# Altium PCB usbtinyisp.PcbDoc
Units mm, origin at the board's own origin, x right, y up, seen from the top; angles counter-clockwise.
Board outline 55 x 20 mm, 2 copper layers (Top Layer, Bottom Layer); 27 components, 29 nets, 99 pads, 28 vias.
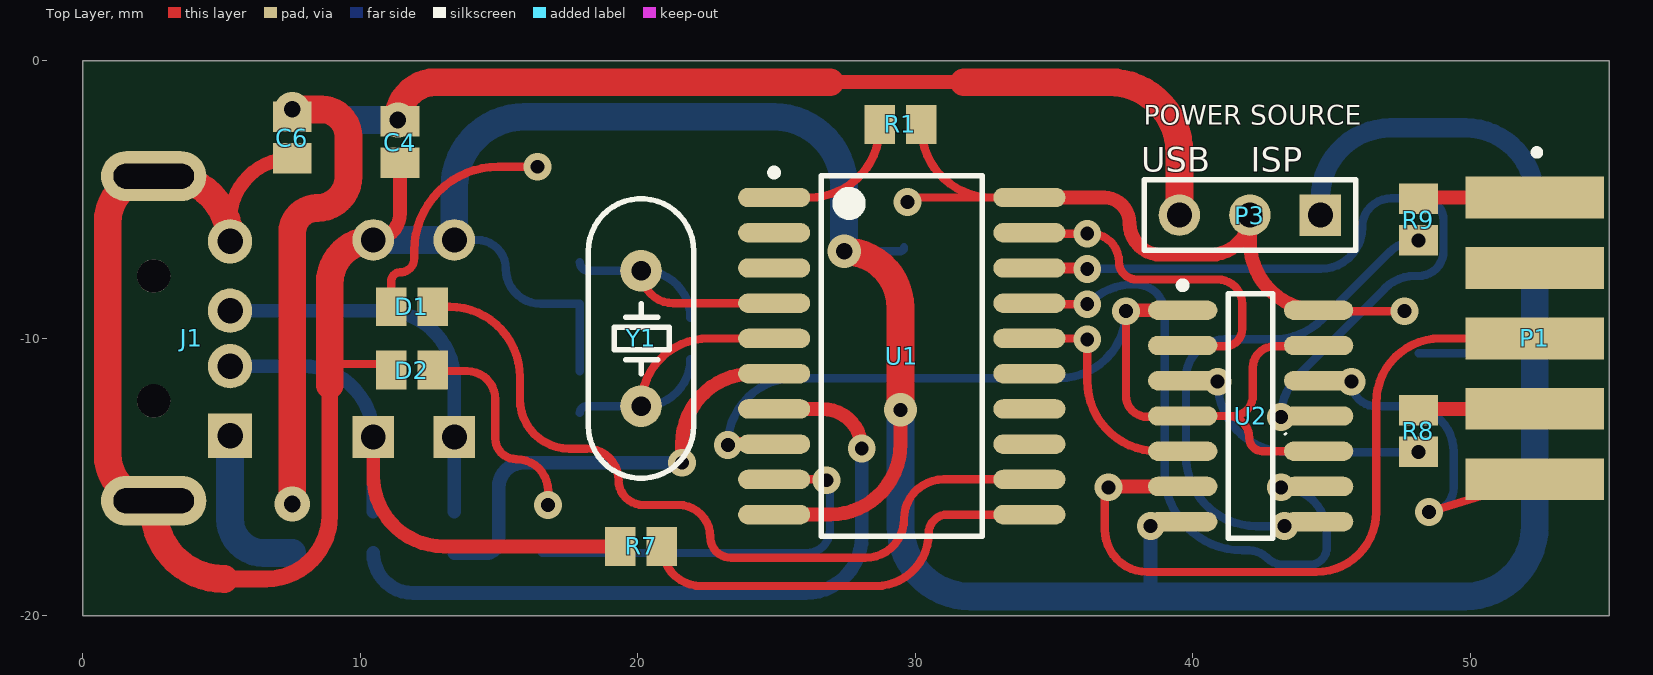
[diagram p0: Top Layer view]
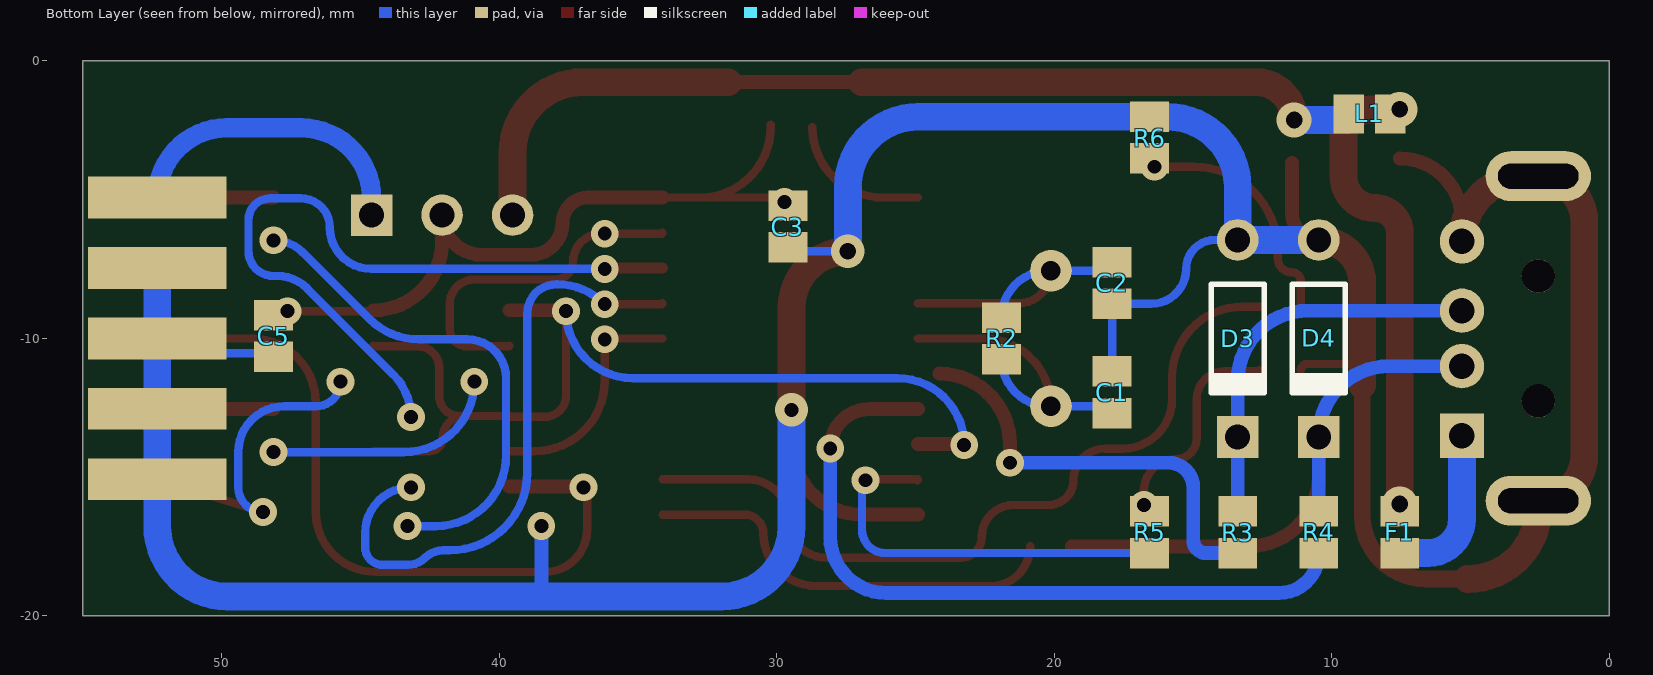
[diagram p1: Bottom Layer view, seen from below]

## Layer stack, top to bottom
Top Solder: solder mask 0.0102, Solder Resist, Dk 3.5
Top Layer: signal copper 0.0356
Dielectric 1: dielectric 0.32, FR-4, Dk 4.8
Bottom Layer: signal copper 0.0356
Bottom Solder: solder mask 0.0102, Solder Resist, Dk 3.5

## Board outline
0,-20 0,0 55,0 55,-20

## Design rules (kind name [scope] priority, off if disabled: settings)
Clearance [All] p1: gap=0.254
PolygonConnect [All] p1: connectstyle=Direct reliefconductorwidth=0.254 reliefentries=4 polygonreliefangle="90 Angle" airgapwidth=0.254
RoutingVias [All] p1: holewidth=0.5 width=1 viastyle="Through Hole" minholewidth=0.5 minwidth=1 maxholewidth=0.8 maxwidth=1.2
SolderMaskExpansion [All] p1: expansion=0.102
Width [All] p1: maxlimit=1 minlimit=0.1 preferedwidth=0.3 minimp=50.000000 maximp=50.000000 favimp=50.000000
30 further rules are at their usual default settings.

## Components (designator, comment, footprint, x,y, rotation, side; value= is the part's Value field where it differs from the comment)
C1 "Cap" C0805 17.907,-11.938 r270 bottom
C2 "Cap" C0805 17.907,-8.001 r90 bottom
C3 "Cap" C0805 29.591,-5.969 r90 bottom
C4 "Cap" C0805 11.43,-2.921 r270 top
C5 "Cap" C0805 48.133,-9.906 r90 bottom
C6 "Cap" C0805 7.54,-2.761 r90 top
D1 "LED" C0805 11.858,-8.857 r180 top
D2 "LED" C0805 11.858,-11.143 r180 top
D3 "Zener 3.6V" DO-35 13.382,-10 r270 bottom
D4 "Zener 3.6V" DO-35 10.461,-10 r270 bottom
F1 "Fuse 1" C0805 7.54,-16.985 r270 bottom
J1 "USB 2.0 A Plug TH" USB2_A_TH_PLUG 0,-10 r180 top
L1 "Ferrite" C0805 8.636,-1.905 r180 bottom
P1 "ISP" BOX2X5_PCB_EDGE 52.324,-10 r0 top
P3 "Select Power" HDR1X3 44.597,-5.555 r180 top
R1 "Res1" C0805 29.464,-2.286 r0 top
R2 "Res1" C0805 21.891,-10 r270 bottom
R3 "Res1" C0805 13.382,-16.985 r270 bottom
R4 "Res1" C0805 10.461,-16.985 r270 bottom
R5 "Res1" C0805 16.557,-16.985 r90 bottom
R6 "Res1" C0805 16.557,-2.761 r90 bottom
R7 "Res1" C0805 20.113,-17.493 r0 top
R8 "Res1" C0805 48.133,-13.335 r90 top
R9 "Res1" C0805 48.133,-5.715 r90 top
U1 "ATtiny2313A-SU" 20S_M 29.511,-10.635 r0 top
U2 "SN74AHC125D" D014_M 42.084,-12.794 r0 top
Y1 "XTAL" XTAL 20.113,-10 r90 top

## Footprints (in the part's own frame and the unit in brackets; to place one, negate y for a bottom-side part, rotate by r counter-clockwise, add the part's x,y. Pads: shape width x height; smd on the part's side, far side on the other; paste and mask are expansions set on the pad)
20S_M [mm] "SOIC, 20-Leads, Body 12.8x7.5mm, Pitch 1.27mm, IPC Low Density"
  oval 2.6x0.7 smd: 1(-4.6,5.715) 2(-4.6,4.445) 3(-4.6,3.175) 4(-4.6,1.905) 5(-4.6,0.635) 6(-4.6,-0.635) 7(-4.6,-1.905) 8(-4.6,-3.175) 9(-4.6,-4.445) 10(-4.6,-5.715) 11(4.6,-5.715) 12(4.6,-4.445) 13(4.6,-3.175) 14(4.6,-1.905) 15(4.6,-0.635) 16(4.6,0.635) 17(4.6,1.905) 18(4.6,3.175) 19(4.6,4.445) 20(4.6,5.715)
  silkscreen extent -4.72,-6.5 2.9,6.74, body extent -3.75,-6.5 3.75,6.5, height 2.65
BOX2X5_PCB_EDGE [mm] "Box Header on PCB Edge; 5x2 Position"
  rect 5x1.5 smd: 1(0,5.08) 3(0,2.54) 5(0,0) 7(0,-2.54) 9(0,-5.08)
  rect 5x1.5 smd far side: 2(0,5.08) 4(0,2.54) 6(0,0) 8(0,-2.54) 10(0,-5.08)
  silkscreen extent -0.02,6.61 0.18,6.81
C0805 [mm] "Chip Capacitor, Body 2.0x1.3mm, IPC High Density"
  rect 1.1x1.4 smd: 1(-0.75,0) 2(0.75,0)
  body extent -1.1,-0.72 1.1,0.72, height 1.4
D014_M [mm] "SOIC, 14-Leads, Body 8.7x3.9mm, Pitch 1.27mm, IPC Low Density"
  oval 2.5x0.7 smd: 1(-2.45,3.81) 2(-2.45,2.54) 3(-2.45,1.27) 4(-2.45,0) 5(-2.45,-1.27) 6(-2.45,-2.54) 7(-2.45,-3.81) 8(2.45,-3.81) 9(2.45,-2.54) 10(2.45,-1.27) 11(2.45,0) 12(2.45,1.27) 13(2.45,2.54) 14(2.45,3.81)
  silkscreen extent -2.57,-4.4 0.8,4.83, body extent -2,-4.38 2,4.38, height 1.75
DO-35 [mm] "Diode, Axial; Body 3.8 x 1.9 mm (LxDia. max), Lead Dia. 0.53 mm (max)"
  round 1.5 hole 0.9: 1(-3.55,0)
  rect 1.5x1.5 hole 0.9: 2(3.55,0)
  silkscreen extent -1.95,-0.95 2.05,0.95
HDR1X3 [mm] "Connector; Header; 3 Position"
  rect 1.5x1.5 hole 0.9: 1(0,0)
  round 1.5 hole 0.9: 2(2.54,0) 3(5.08,0)
  silkscreen extent -1.27,-1.27 6.35,1.27
USB2_A_TH_PLUG [mm] "USB 2.0 A Plug Thru Hole"
  rect 1.6x1.6 hole 0.92: 1(-5.3,3.5)
  round 1.6 hole 0.92: 2(-5.3,1) 3(-5.3,-1) 4(-5.3,-3.5)
  oval 3.8x1.8 hole 0.9 slot 2.9 at 0 deg: 5(-2.55,-5.85) 6(-2.55,5.85)
  round 1.2 hole 1.2 unplated: ""(-2.55,2.25) ""(-2.55,-2.25)
XTAL [mm] "HC-49US Series, Thru Hole, 2 Leads"
  round 1.5 hole 0.7: 1(-2.44,0) 2(2.44,0)
  silkscreen extent -5.04,-1.91 5.04,1.91

## Part data
C1 C2 C3 C4 C5 C6: "Capacitor"
D1 D2: "Typical RED GaAs LED"
D3 D4: library part "D Zener", "Zener Diode"
F1: "Fuse"
J1: "USB 2.0 A Plug, Thru-Hole"
L1: library part Inductor, "Inductor"
P1: library part "Box 5X2", "Box, 5-Pin, Dual row"
P3: library part "Header 3", "Header, 3-Pin"
R1 R2 R3 R4 R5 R6 R7 R8 R9: "Resistor"
U1: "8-bit AVR Microcontroller, 1.8-5.5V, 2KB Flash, 128 Bytes EEPROM, 128 Bytes SRAM, 20-pin SOIC, Industrial Grade (-40°C to 85°C), Pb-Free"
U2: "Quadruple Bus Buffer Gate with 3-State Outputs"
Y1: "Crystal Oscillator"

## Via types
v1: diameter 1, hole 0.5, Top Layer to Bottom Layer, 23 vias
v2: diameter 1.27, hole 0.6, Top Layer to Bottom Layer, 3 vias
v3: diameter 1.2, hole 0.5, Top Layer to Bottom Layer, 1 vias
v4: diameter 1.2, hole 0.6, Top Layer to Bottom Layer, 1 vias

## Nets (pads, with @x,y where several pads share a name; then routed paths per layer and width w, separated by ;. In a path a pad name is that pad's centre, name@x,y a point inside that pad or via, vN(x,y) a via of type N, cw(c..) or ccw(c..) an arc to the next point about the centre after c; other vN are vias at no path point)
CONTROL: U1.8 U2.1 U2.4 U2.10 U2.13 | length 37.2
  Top Layer w0.3: v1(37.592,-9.017) 37.592,-12.065 ccw(c38.354,-12.065) 38.354,-12.827 39.601,-12.827 ccw(c39.601,-12.794) U2.4 41.242,-12.794 ; U2.10 42.512,-14.064 cw(c42.512,-13.589) 42.037,-13.589 ccw(c41.242,-13.589) 41.242,-12.794 ; U2.13 cw(c44.501,-10.254) 44.501,-10.287 42.926,-10.287 ccw(c42.926,-11.049) 42.164,-11.049 42.164,-12.065 cw(c41.435,-12.065) 41.435,-12.794 41.242,-12.794
  Top Layer w0.5: v1(23.241,-13.843) cw(c23.274,-13.843) 23.274,-13.81 U1.8 ; v1(37.592,-9.017) cw(c37.625,-9.017) 37.625,-8.984 U2.1
  Bottom Layer w0.3: v1(23.241,-13.843) cw(c25.654,-13.843) 25.654,-11.43 35.179,-11.43 ccw(c35.179,-9.017) v1(37.592,-9.017)
GND: C1.1 C2.1 C3.1 C4.2 C5.1 C6.1 D2.2 D3.1 D4.1 J1.4 J1.5 J1.6 P1.4 P1.6 P1.8 P1.10 R6.2 U1.10 U2.7 | length 141.9
  Top Layer w0.3: 8.89,-10.922 10.887,-10.922 cw(c10.887,-11.143) D2.2
  Top Layer w0.5: J1.4 5.3,-5.751 cw(c7.54,-5.751) C6.1 ; D4.1 ccw(c10.461,-5.481) 11.43,-5.481 C4.2 ; U1.10 26.924,-16.35 ccw(c26.924,-13.81) 29.464,-13.81 v3(29.464,-12.573)
  Top Layer w0.6: 5.09,-18.669 6.604,-18.669 ccw(c6.604,-16.383) 8.89,-16.383 8.89,-11.684
  Top Layer w1: 5.09,-18.669 cw(c5.09,-16.129) 2.55,-16.129 J1.6 cw(c2.55,-14.189) 0.889,-14.189 0.889,-5.811 cw(c2.55,-5.811) J1.5 2.95,-4.15 cw(c2.95,-6.5) J1.4 ; 8.89,-11.684 8.89,-10.922 8.89,-8.021 cw(c10.461,-8.021) D4.1 ; v4(27.432,-6.858) cw(c27.432,-8.89) 29.464,-8.89 v3(29.464,-12.573)
  Bottom Layer w0.3: D3.1 14.197,-6.45 cw(c14.197,-7.493) 15.24,-7.493 ccw(c16.498,-7.493) 16.498,-8.751 C2.1 C1.1 ; v4(27.432,-6.858) 29.452,-6.858 ccw(c29.452,-6.719) C3.1 ; C5.1@48.133,-10.529 P1.6@51.668,-10.529
  Bottom Layer w0.5: 38.481,-19.304 v1(38.481,-16.764)
  Bottom Layer w1: D4.1 D3.1 13.382,-4.551 cw(c15.922,-4.551) 15.922,-2.011 R6.2 24.892,-2.011 cw(c24.892,-4.551) 27.432,-4.551 v4(27.432,-6.858) ; v3(29.464,-12.573) 29.464,-16.764 ccw(c32.004,-16.764) 32.004,-19.304 49.784,-19.304 ccw(c49.784,-16.764) 52.324,-16.764 P1.10 P1.8 P1.6 P1.4
ISP_VCC: P1.2 P3.1 | length 11.2
  Bottom Layer w0.7: P3.1 44.597,-4.953 cw(c47.137,-4.953) 47.137,-2.413 49.817,-2.413 cw(c49.817,-4.92) P1.2
MISO: P1.9 U2.12 | length 11.8
  Top Layer w0.3: v1(48.514,-16.256) P1.9
  Bottom Layer w0.3: v1(45.72,-11.557) ccw(c46.609,-11.557) 46.609,-12.446 47.752,-12.446 cw(c47.752,-14.097) 49.403,-14.097 49.403,-15.367 cw(c48.514,-15.367) v1(48.514,-16.256)
MISO2: U1.18 U2.11 | length 26.8
  Top Layer w0.4: U1.18 36.162,-7.46 cw(c36.162,-7.493) v1(36.195,-7.493)
  Bottom Layer w0.3: v1(36.195,-7.493) 44.61,-7.493 ccw(c44.61,-6.002) 46.101,-6.002 cw(c47.15,-6.002) 47.15,-4.953 48.249,-4.953 cw(c48.249,-5.741) 49.037,-5.741 49.037,-6.843 cw(c48.133,-6.843) 48.133,-7.747 48.006,-7.747 ccw(c48.006,-9.28) 46.922,-8.196 43.809,-11.309 ccw(c45.326,-12.827) v1(43.18,-12.827)
MOSI: P1.1 R9.2 | length 4.2
  Top Layer w0.5: R9.2@48.133,-4.92 P1.1
MOSI2: U1.17 U2.9 | length 22.5
  Top Layer w0.3: U1.17 ccw(c34.144,-8.73) 34.144,-8.763 v1(36.195,-8.763)
  Bottom Layer w0.3: v1(36.195,-8.763) cw(c37.924,-10.492) 37.924,-8.047 cw(c37.924,-9.112) 38.989,-9.112 38.989,-14.844 ccw(c41.783,-14.844) 41.783,-17.638 42.023,-17.638 cw(c42.023,-18.556) 42.672,-17.907 ccw(c43.285,-17.294) 43.285,-18.161 44.196,-18.161 ccw(c44.196,-17.526) 44.831,-17.526 44.831,-17.018 ccw(c43.18,-17.018) v1(43.18,-15.367)
NetC1_2: C1.2 R2.2 U1.5 Y1.1 | length 11.3
  Top Layer w0.3: Y1.1 cw(c22.553,-12.44) 22.553,-10 U1.5
  Bottom Layer w0.3: C1.2 cw(c18.155,-12.688) 18.155,-12.44 Y1.1 20.201,-12.44 ccw(c20.201,-10.75) R2.2
NetC2_2: C2.2 R2.1 U1.4 Y1.2 | length 10.5
  Top Layer w0.3: Y1.2 ccw(c21.283,-7.56) 21.283,-8.73 U1.4
  Bottom Layer w0.3: C2.2 ccw(c18.216,-7.251) 18.216,-7.56 Y1.2 ; Y1.2@20.201,-7.56 cw(c20.201,-9.25) R2.1
NetC4_1: C4.1 L1.1 P3.3 | length 34.6
  Top Layer w0.5: 26.924,-0.762 31.75,-0.762
  Top Layer w1: v2(11.35,-2.126) cw(c12.714,-2.126) 12.714,-0.762 26.924,-0.762 ; 31.75,-0.762 36.977,-0.762 cw(c36.977,-3.302) 39.517,-3.302 P3.3
  Bottom Layer w1: L1.1@9.433,-2.126 v2(11.35,-2.126)
NetC6_2: C6.2 F1.1 L1.2 | length 17
  Top Layer w1: v2(7.54,-15.969) 7.54,-6.19 cw(c8.429,-6.19) 8.429,-5.301 ccw(c8.429,-4.158) 9.572,-4.158 9.572,-2.729 ccw(c8.588,-2.729) 8.588,-1.745 v2(7.54,-1.745)
NetD1_1: D1.1 U1.12 | length 28.6
  Top Layer w0.3: D1.1 13.208,-8.857 cw(c13.208,-11.397) 15.748,-11.397 15.748,-12.192 ccw(c17.526,-12.192) 17.526,-13.97 18.161,-13.97 cw(c18.161,-15.113) 19.304,-15.113 ccw(c20.193,-15.113) 20.193,-16.002 21.463,-16.002 cw(c21.463,-17.145) 22.606,-17.145 ccw(c23.368,-17.145) 23.368,-17.907 28.194,-17.907 ccw(c28.194,-16.51) 29.591,-16.51 cw(c31.021,-16.51) 31.021,-15.08 U1.12
NetD1_2: D1.2 R6.1 | length 8.7
  Top Layer w0.3: D1.2 11.108,-7.942 cw(c11.43,-7.942) 11.43,-7.62 ccw(c11.43,-7.112) 11.938,-7.112 11.938,-6.837 cw(c14.965,-6.837) 14.965,-3.81 v1(16.383,-3.81)
NetD2_1: D2.1 R5.2 | length 7.7
  Top Layer w0.3: D2.1 ccw(c12.641,-11.143) 12.641,-11.176 13.843,-11.176 cw(c13.843,-12.192) 14.859,-12.192 14.859,-13.589 ccw(c15.621,-13.589) 15.621,-14.351 cw(c15.621,-15.494) 16.764,-15.494 v1(16.764,-16.002)
NetD3_2: D3.2 J1.3 R3.1 | length 14.2
  Bottom Layer w0.5: J1.3 10.842,-9 cw(c10.842,-11.54) 13.382,-11.54 D3.2 R3.1
NetD4_2: D4.2 J1.2 R4.1 R7.1 | length 21.1
  Top Layer w0.5: D4.2 10.461,-14.953 ccw(c13.001,-14.953) 13.001,-17.493 R7.1
  Bottom Layer w0.5: J1.2 7.921,-11 cw(c7.921,-13.54) D4.2@10.461,-13.54 ; R4.1 D4.2
NetF1_2: F1.2 J1.1 | length 5.9
  Bottom Layer w1: J1.1 5.3,-16.511 ccw(c6.524,-16.511) 6.524,-17.735 F1.2
NetR3_2: R3.2 U1.6 | length 15.5
  Top Layer w0.5: v1(21.59,-14.478) 21.59,-13.81 cw(c24.13,-13.81) U1.6@24.13,-11.27
  Bottom Layer w0.5: R3.2 14.523,-17.735 ccw(c14.523,-17.272) 14.986,-17.272 14.986,-15.367 cw(c15.875,-15.367) 15.875,-14.478 v1(21.59,-14.478)
NetR4_2: R4.2 U1.7 | length 26.7
  Top Layer w0.5: U1.7 26.637,-12.54 cw(c26.637,-13.97) v1(28.067,-13.97)
  Bottom Layer w0.5: R4.2 ccw(c11.903,-17.735) 11.903,-19.177 26.035,-19.177 ccw(c26.035,-17.145) 28.067,-17.145 v1(28.067,-13.97)
NetR5_1: R5.1 U1.9 | length 14.7
  Top Layer w0.3: U1.9@24.944,-15.113 cw(c24.944,-15.08) U1.9 26.764,-15.08 cw(c26.764,-15.113) v1(26.797,-15.113)
  Bottom Layer w0.3: R5.1 26.08,-17.735 ccw(c26.08,-16.891) 26.924,-16.891 26.924,-15.24 ccw(c26.797,-15.24) v1(26.797,-15.113)
NetR7_2: R7.2 U1.11 | length 15.5
  Top Layer w0.3: R7.2 ccw(c22.293,-17.493) 22.293,-18.923 28.575,-18.923 ccw(c28.575,-17.018) 30.48,-17.018 cw(c31.148,-17.018) 31.148,-16.35 U1.11
NetR8_1: R8.1 U2.3 | length 8.7
  Bottom Layer w0.3: v1(40.894,-11.557) ccw(c43.434,-11.557) 43.434,-14.097 v1(48.133,-14.097)
NetR9_1: R9.1 U2.8 | length 18.4
  Bottom Layer w0.3: v1(43.307,-16.764) 42.291,-16.764 cw(c42.291,-14.224) 39.751,-14.224 39.751,-11.43 cw(c41.148,-11.43) 41.148,-10.033 42.89,-10.033 ccw(c42.89,-7.493) 44.686,-9.289 47.069,-6.906 cw(c48.133,-7.969) v1(48.133,-6.465) v1@48.018,-6.465
RESET: R1.1 U1.1 | length 5.3
  Top Layer w0.3: U1.1 26.174,-4.92 ccw(c26.174,-2.38) R1.1@28.714,-2.38
RST: P1.5 U2.6 | length 27.2
  Top Layer w0.3: v1(36.957,-15.367) ccw(c36.957,-15.494) 36.83,-15.494 36.83,-16.891 ccw(c38.354,-16.891) 38.354,-18.415 44.45,-18.415 ccw(c44.45,-16.256) 46.609,-16.256 46.609,-12.319 cw(c48.928,-12.319) 48.928,-10 P1.5
  Top Layer w0.5: v1@36.957,-15.494 cw(c37.117,-15.494) 37.117,-15.334 U2.6
RST2: U1.16 U2.5 | length 8.5
  Top Layer w0.3: U1.16 v1@36.195,-10 ; v1(36.195,-10.033) 36.195,-11.524 ccw(c38.735,-11.524) 38.735,-14.064 U2.5
SCK: P1.7 R8.2 | length 4.3
  Top Layer w0.5: R8.2@48.133,-12.54 P1.7 ; R8.2@48.688,-12.585 cw(c48.733,-12.585) R8.2@48.733,-12.54
SCK2: U1.19 U2.2 | length 12.6
  Top Layer w0.3: U1.19 ccw(c34.144,-6.19) 34.144,-6.223 v1(36.195,-6.223) 36.322,-6.223 cw(c36.322,-7.239) 37.338,-7.239 ccw(c37.973,-7.239) 37.973,-7.874 40.894,-7.874 cw(c40.894,-8.763) 41.783,-8.763 41.783,-9.652 cw(c41.148,-9.652) 41.148,-10.287 39.667,-10.287 cw(c39.667,-10.254) U2.2
VCC: C3.2 C5.2 P3.2 R1.2 U1.20 U2.14 | length 26.5
  Top Layer w0.3: v1(29.718,-5.08) cw(c29.878,-5.08) 29.878,-4.92 32.754,-4.92 ; R1.2 30.214,-2.38 ccw(c32.754,-2.38) 32.754,-4.92 ; U1.20 32.754,-4.92 ; U2.14 ccw(c44.567,-8.984) 44.567,-9.017 v1(47.625,-9.017)
  Top Layer w0.5: U1.20 36.797,-4.92 cw(c36.797,-5.842) 37.719,-5.842 ccw(c38.862,-5.842) 38.862,-6.985 40.627,-6.985 ccw(c40.627,-5.555) P3.2 42.057,-6.507 ccw(c44.534,-6.507) U2.14
pads on no net: J1. P1.3 U1.2 U1.3 U1.13 U1.14 U1.15

## Silkscreen, mask and mechanical layers (free items; w line width, h text height)
Top Overlay:
  lines w0.1: 43.327,-13.456 43.354,-13.429
  text "POWER SOURCE" at 38.227,-2.54 h1.2
  text "USB" at 38.147,-4.285 h1.5
  text "ISP" at 42.084,-4.285 h1.5
Mechanical 1:
  the board outline again, w0.2

## Text inside footprints (layer, text, board x,y; h text height)
J1: Mechanical 13 "PCB Edge" at 0.25,-9.094 h0.25 r270